# EAGLE board linesensor2 (EAGLE 6.5.0)
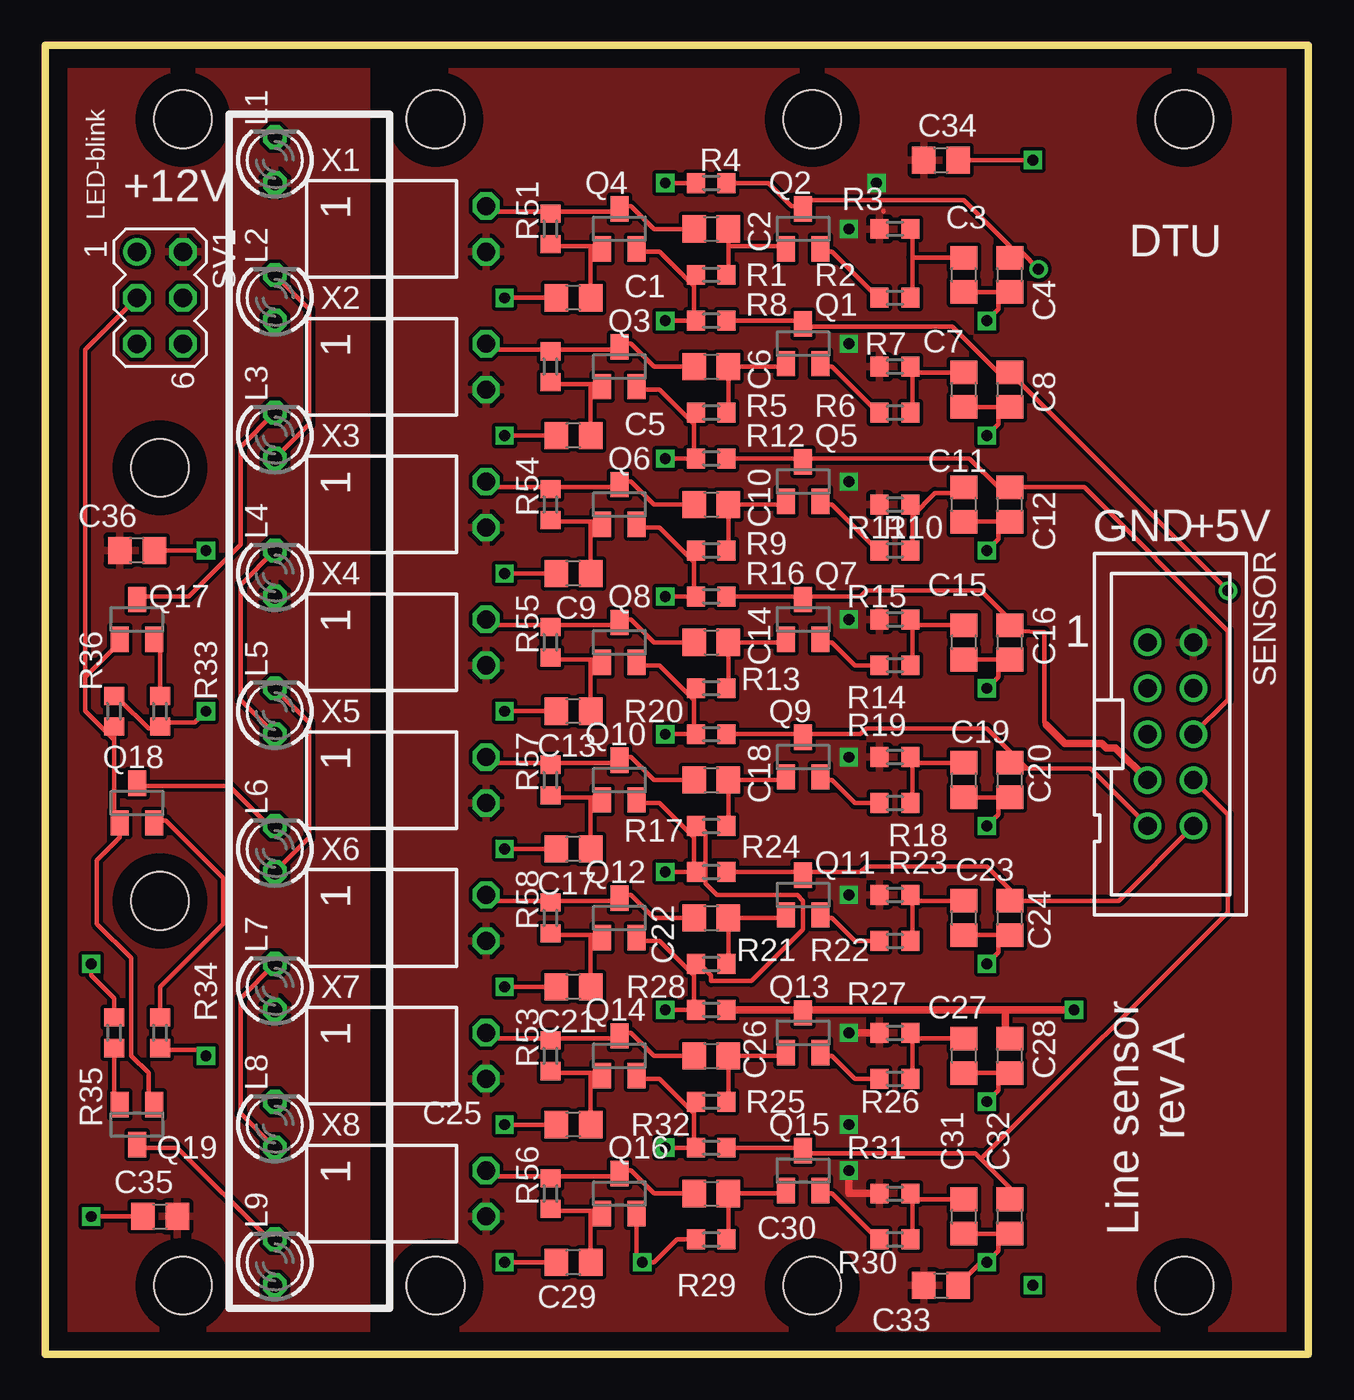
[diagram p0: board, top side]
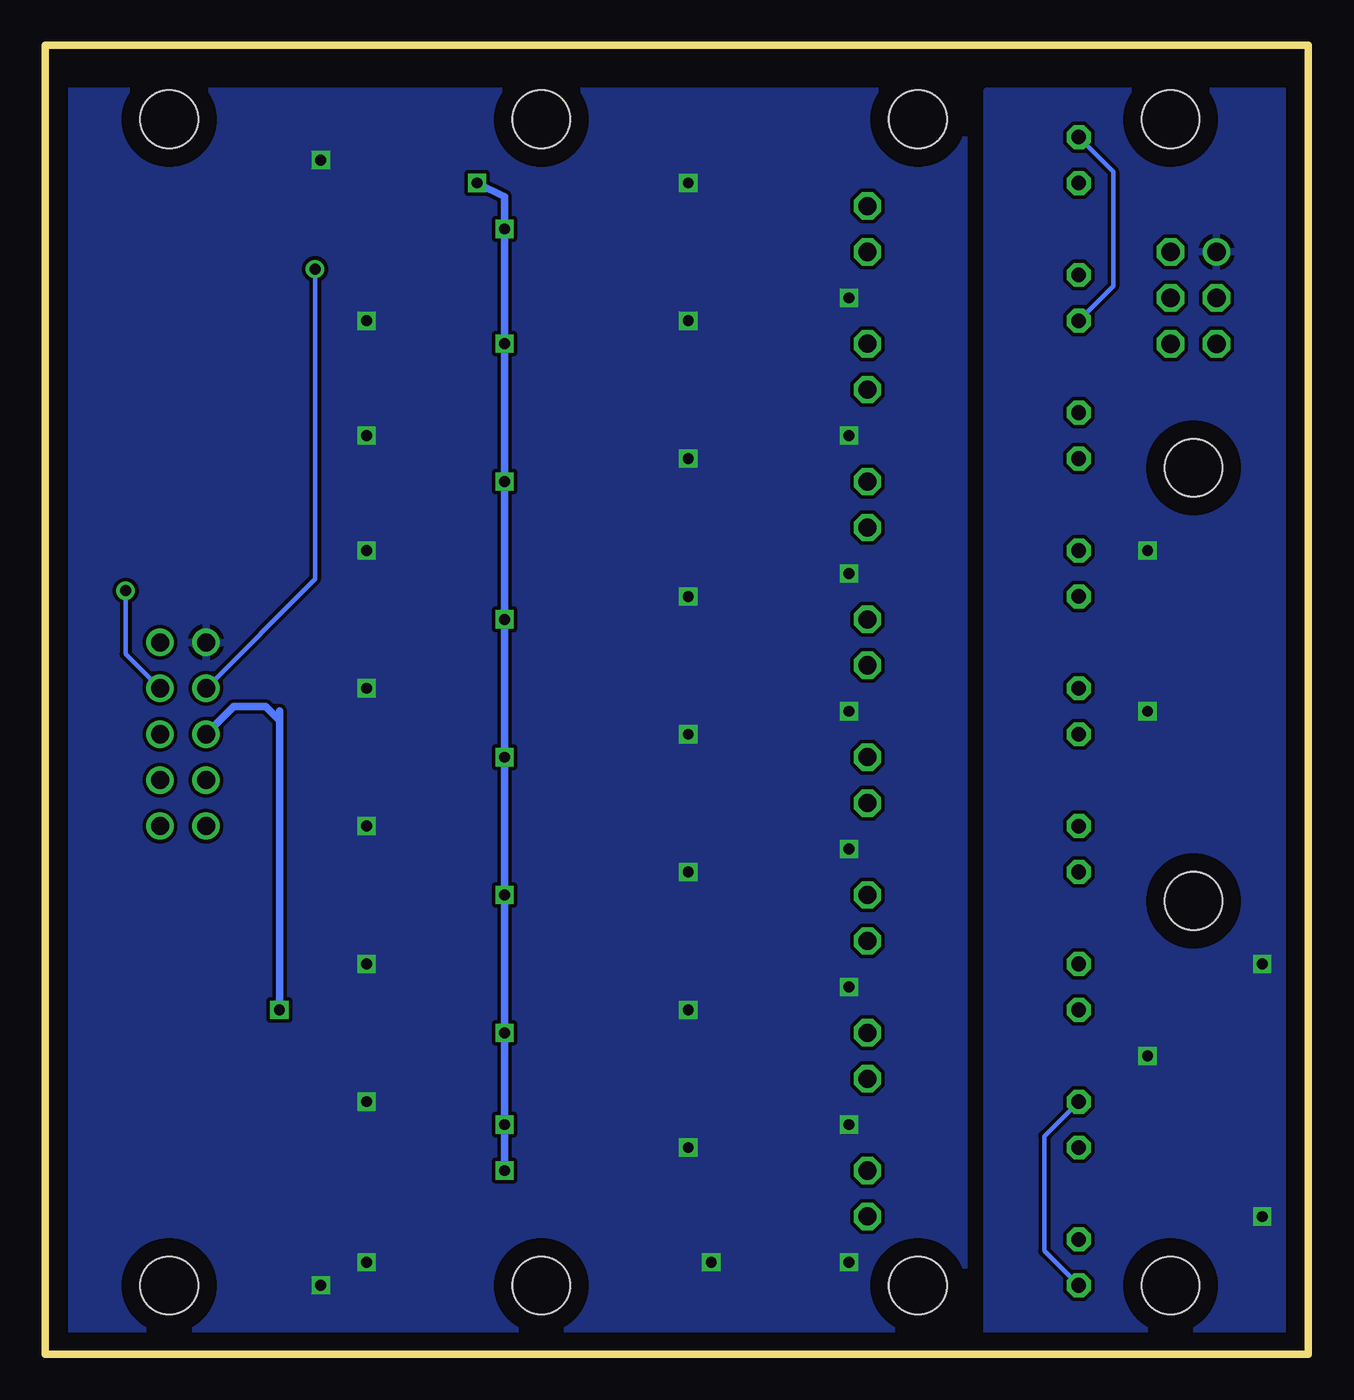
[diagram p1: board, bottom side, seen from below]

Size 69.85 x 72.39 mm. Coordinates in mm from the lower left corner, seen from the top.
Outline: 0,0 0,72.39 69.85,72.39 69.85,0 0,0
Copper layers (1*16): Top 0.035mm / dielectric 1.5mm / Bottom 0.035mm
Design rules "default *": minimum track width 10mil, minimum drill 0.6mm, track to track 8mil, track to pad 8mil, pad to pad 8mil, via to via 8mil, smd to smd 8mil, copper to edge 40mil, drill to drill 8mil, minimum pad ring 10mil, minimum via ring 8mil, stop-mask expansion 4mil, vias tented up to drill 0mil, thermal gap 10mil
Holes 3.2 mm at 7.62,3.81 21.59,68.3 21.59,3.81 6.35,25.07 6.35,49.02 7.62,68.3 42.42,68.3 42.42,3.81 62.99,68.3 62.99,3.81

## Footprints (pad centres in the part's own frame; a part is rotated, then mirrored left to right if it is on the bottom)
C0805 = smd 1.3 x 1.5: 1 -0.95,0; 2 0.95,0
LED3MM = drill 0.813 octagon: A -1.27,0; K 1.27,0
SOT23 = smd 1 x 1.4: 1 -0.95,-1.1; 2 0.95,-1.1; 3 0,1.1
R0603 = smd 1 x 1.1: 1 -0.85,0; 2 0.85,0
PAK100/2500-10 = drill 1 pad 1.422: 1 -5.08,-1.27; 2 -5.08,1.27; 3 -2.54,-1.27; 4 -2.54,1.27; 5 0,-1.27; 6 0,1.27; 7 2.54,-1.27; 8 2.54,1.27; 9 5.08,-1.27; 10 5.08,1.27
MA03-2 = drill 1.016: 1 -2.54,-1.27 | drill 1.016 octagon: 2 -2.54,1.27; 3 0,-1.27; 4 0,1.27; 5 2.54,-1.27; 6 2.54,1.27
SSW-102-02-S-S-RA = drill 1 pad 1.5 octagon: 1 -1.27,1.524; 2 1.27,1.524

## Placement (x,y rotation side)
C1  470nF  [C0805]  29.21,58.42 180 top
C2  100pF  [C0805]  36.83,62.23 0 top
C3  1uF  [C0805]  50.8,59.69 90 top
C4  3.9nF  [C0805]  53.34,59.69 90 top
C5  470nF  [C0805]  29.21,50.8 180 top
C6  100pF  [C0805]  36.83,54.61 0 top
C7  1uF  [C0805]  50.8,53.34 90 top
C8  3.9nF  [C0805]  53.34,53.34 90 top
C9  470nF  [C0805]  29.21,43.18 180 top
C10  100pF  [C0805]  36.83,46.99 0 top
C11  1uF  [C0805]  50.8,46.99 90 top
C12  3.9nF  [C0805]  53.34,46.99 90 top
C13  470nF  [C0805]  29.21,35.56 180 top
C14  100pF  [C0805]  36.83,39.37 0 top
C15  1uF  [C0805]  50.8,39.37 90 top
C16  3.9nF  [C0805]  53.34,39.37 90 top
C17  470nF  [C0805]  29.21,27.94 180 top
C18  100pF  [C0805]  36.83,31.75 0 top
C19  1uF  [C0805]  50.8,31.75 90 top
C20  3.9nF  [C0805]  53.34,31.75 90 top
C21  470nF  [C0805]  29.21,20.32 180 top
C22  100pF  [C0805]  36.83,24.13 0 top
C23  1uF  [C0805]  50.8,24.13 90 top
C24  3.9nF  [C0805]  53.34,24.13 90 top
C25  470nF  [C0805]  29.21,12.7 180 top
C26  100pF  [C0805]  36.83,16.51 0 top
C27  1uF  [C0805]  50.8,16.51 90 top
C28  3.9nF  [C0805]  53.34,16.51 90 top
C29  470nF  [C0805]  29.21,5.08 180 top
C30  100pF  [C0805]  36.83,8.89 0 top
C31  1uF  [C0805]  50.8,7.62 90 top
C32  3.9nF  [C0805]  53.34,7.62 90 top
C33  1uF  [C0805]  49.53,3.81 0 top
C34  1uF  [C0805]  49.53,66.04 0 top
C35  1uF  [C0805]  6.35,7.62 0 top
C36  1uF  [C0805]  5.08,44.45 180 top
L1  red  [LED3MM]  12.7,66.04 90 top
L2  red  [LED3MM]  12.7,58.42 90 top
L3  red  [LED3MM]  12.7,50.8 90 top
L4  red  [LED3MM]  12.7,43.18 90 top
L5  red  [LED3MM]  12.7,35.56 90 top
L6  red  [LED3MM]  12.7,27.94 90 top
L7  red  [LED3MM]  12.7,20.32 90 top
L8  red  [LED3MM]  12.7,12.7 90 top
L9  red  [LED3MM]  12.7,5.08 90 top
Q1  [SOT23]  41.91,55.88 0 top
Q2  [SOT23]  41.91,62.23 0 top
Q3  [SOT23]  31.75,54.61 0 top
Q4  [SOT23]  31.75,62.23 0 top
Q5  [SOT23]  41.91,48.26 0 top
Q6  [SOT23]  31.75,46.99 0 top
Q7  [SOT23]  41.91,40.64 0 top
Q8  [SOT23]  31.75,39.37 0 top
Q9  [SOT23]  41.91,33.02 0 top
Q10  [SOT23]  31.75,31.75 0 top
Q11  [SOT23]  41.91,25.4 0 top
Q12  [SOT23]  31.75,24.13 0 top
Q13  [SOT23]  41.91,17.78 0 top
Q14  [SOT23]  31.75,16.51 0 top
Q15  [SOT23]  41.91,10.16 0 top
Q16  [SOT23]  31.75,8.89 0 top
Q17  mmbf170  [SOT23]  5.08,40.64 0 top
Q18  mmbf170  [SOT23]  5.08,30.48 0 top
Q19  mmbf170  [SOT23]  5.08,12.7 180 top
R1  1M  [R0603]  36.83,59.69 0 top
R2  820  [R0603]  46.99,58.42 0 top
R3  56k  [R0603]  46.99,62.23 180 top
R4  12k  [R0603]  36.83,64.77 0 top
R5  1M  [R0603]  36.83,52.07 0 top
R6  820  [R0603]  46.99,52.07 0 top
R7  56k  [R0603]  46.99,54.61 180 top
R8  12k  [R0603]  36.83,57.15 0 top
R9  1M  [R0603]  36.83,44.45 0 top
R10  820  [R0603]  46.99,44.45 0 top
R11  56k  [R0603]  46.99,46.99 180 top
R12  12k  [R0603]  36.83,49.53 0 top
R13  1M  [R0603]  36.83,36.83 0 top
R14  820  [R0603]  46.99,38.1 0 top
R15  56k  [R0603]  46.99,40.64 180 top
R16  12k  [R0603]  36.83,41.91 0 top
R17  1M  [R0603]  36.83,29.21 0 top
R18  820  [R0603]  46.99,30.48 0 top
R19  56k  [R0603]  46.99,33.02 180 top
R20  12k  [R0603]  36.83,34.29 0 top
R21  1M  [R0603]  36.83,21.59 0 top
R22  820  [R0603]  46.99,22.86 0 top
R23  56k  [R0603]  46.99,25.4 180 top
R24  12k  [R0603]  36.83,26.67 0 top
R25  1M  [R0603]  36.83,13.97 0 top
R26  820  [R0603]  46.99,15.24 0 top
R27  56k  [R0603]  46.99,17.78 180 top
R28  12k  [R0603]  36.83,19.05 0 top
R29  1M  [R0603]  36.83,6.35 0 top
R30  820  [R0603]  46.99,6.35 0 top
R31  56k  [R0603]  46.99,8.89 180 top
R32  12k  [R0603]  36.83,11.43 0 top
R33  12  [R0603]  6.35,35.56 90 top
R34  12  [R0603]  6.35,17.78 90 top
R35  12  [R0603]  3.81,17.78 270 top
R36  10k  [R0603]  3.81,35.56 270 top
R51  820k  [R0603]  27.94,62.23 90 top
R52  820k  [R0603]  27.94,54.61 90 top
R53  820k  [R0603]  27.94,16.51 90 top
R54  820k  [R0603]  27.94,46.99 90 top
R55  820k  [R0603]  27.94,39.37 90 top
R56  820k  [R0603]  27.94,8.89 90 top
R57  820k  [R0603]  27.94,31.75 90 top
R58  820k  [R0603]  27.94,24.13 90 top
SENSOR  2510-  [PAK100/2500-10]  62.23,34.29 270 top
SV1  LEDctrl  [MA03-2]  6.35,58.42 270 top
X1  [SSW-102-02-S-S-RA]  22.86,62.23 270 top
X2  [SSW-102-02-S-S-RA]  22.86,54.61 270 top
X3  [SSW-102-02-S-S-RA]  22.86,46.99 270 top
X4  [SSW-102-02-S-S-RA]  22.86,39.37 270 top
X5  [SSW-102-02-S-S-RA]  22.86,31.75 270 top
X6  [SSW-102-02-S-S-RA]  22.86,24.13 270 top
X7  [SSW-102-02-S-S-RA]  22.86,16.51 270 top
X8  [SSW-102-02-S-S-RA]  22.86,8.89 270 top

## Library data of the parts
C1-C36 = eagle-ltspice; SPICEMODEL: NONE; SPICEPREFIX: C
L1-L9 = led
Q1-Q19 = transistor-small-signal
R1-R36 R51-R58 = eagle-ltspice; SPICEMODEL: NONE; SPICEPREFIX: R
SENSOR = con-3m; MF: 3M; MPN: 2510-6002UB; OC_FARNELL: 9838244; OC_NEWARK: 46F4725
SV1 = con-lstb; OC_FARNELL: unknown; OC_NEWARK: unknown
X1-X8 = con-samtec; MPN: BPW46; OC_FARNELL: unknown; OC_NEWARK: 11P9352

## Nets
GATE_CTRL: Q17.1 Q18.1 Q19.1 R36.2 SV1.3
GND: C1.2 C3.1 C4.1 C5.2 C7.1 C8.1 C9.2 C11.1 C12.1 C13.2 C15.1 C16.1 C17.2 C19.1 C20.1 C21.2 C23.1 C24.1 C25.2 C27.1 C28.1 C29.2 C31.1 C32.1 C33.2 C34.2 Q3.2 Q4.2 Q6.2 Q8.2 Q10.2 Q12.2 Q14.2 Q16.2 R1.1 R4.1 R5.1 R8.1 R9.1 R12.1 R13.1 R16.1 R17.1 R20.1 R21.1 R24.1 R25.1 R28.1 R29.1 R32.1 SENSOR.1
GND2: C35.1 C36.1 R33.1 R34.1 R35.1 R36.1 SV1.1
LS0: C4.2 Q2.3 R4.2 SENSOR.3
LS1: C8.2 Q1.3 R8.2 SENSOR.4
LS2: C28.2 Q13.3 R28.2 SENSOR.5
LS3: C12.2 Q5.3 R12.2 SENSOR.6
LS5: C32.2 Q15.3 R32.2 SENSOR.8
LS6: C20.2 Q9.3 R20.2 SENSOR.9
LS7: C24.2 Q11.3 R24.2 SENSOR.10
N$1: Q2.2 R2.1
N$2: Q1.2 R6.1
N$3: C1.1 Q4.1 R51.1
N$4: C2.1 Q4.3 R51.2 X1.1
N$5: C2.2 Q2.1 R1.2
N$6: L1.K L2.A
N$7: C3.2 R2.2 R3.1
N$8: C5.1 Q3.1 R52.1
N$9: C6.1 Q3.3 R52.2 X2.1
N$10: C6.2 Q1.1 R5.2
N$11: L2.K L3.A
N$12: C7.2 R6.2 R7.1
N$14: Q5.2 R10.1
N$15: C9.1 Q6.1 R54.1
N$16: C10.1 Q6.3 R54.2 X3.1
N$17: C10.2 Q5.1 R9.2
N$18: L4.K L5.A
N$19: C11.2 R10.2 R11.1
N$20: Q7.2 R14.1
N$21: C13.1 Q8.1 R55.1
N$22: C14.1 Q8.3 R55.2 X4.1
N$23: C14.2 Q7.1 R13.2
N$24: L5.K L6.A
N$25: C15.2 R14.2 R15.1
N$26: Q9.2 R18.1
N$27: C17.1 Q10.1 R57.1
N$28: C18.1 Q10.3 R57.2 X5.1
N$29: C18.2 Q9.1 R17.2
N$30: L7.K L8.A
N$31: C19.2 R18.2 R19.1
N$32: Q11.2 R22.1
N$33: C21.1 Q12.1 R58.1
N$34: C22.1 Q12.3 R58.2 X6.1
N$35: C22.2 Q11.1 R21.2
N$36: L8.K L9.A
N$37: C23.2 R22.2 R23.1
N$38: Q13.2 R26.1
N$39: C25.1 Q14.1 R53.1
N$40: C26.1 Q14.3 R53.2 X7.1
N$41: C26.2 Q13.1 R25.2
N$42: L3.K Q17.3
N$43: C27.2 R26.2 R27.1
N$44: Q15.2 R30.1
N$45: C29.1 Q16.1 R56.1
N$46: C30.1 Q16.3 R56.2 X8.1
N$47: C30.2 Q15.1 R29.2
N$48: L6.K Q18.3
N$49: C31.2 R30.2 R31.1
N$50: L9.K Q19.3
N$51: Q17.2 R33.2
N$52: Q18.2 R34.2
N$53: Q19.2 R35.2
N$56: C16.2 Q7.3 R16.2 SENSOR.7
VDD: C33.1 C34.1 R3.2 R7.2 R11.2 R15.2 R19.2 R23.2 R27.2 R31.2 SENSOR.2 X1.2 X2.2 X3.2 X4.2 X5.2 X6.2 X7.2 X8.2
VDD2: C35.2 C36.2 L1.A L4.A L7.A SV1.2

## Tracks (layer width: path | path; a pad name or v marks a point on that pad's centre or on a via)
GATE_CTRL
  Top 0.254: 3.81,33.97 3.81,29.84 4.13,29.53 Q18.1 4.13,29.21 4.13,28.57 2.86,27.3 2.86,23.81 4.76,21.91 4.76,16.51 5.71,15.56 5.71,13.97 Q19.1 | 3.81,33.97 R36.2 | 2.22,37.47 4.13,39.37 Q17.1 | 2.22,37.47 2.22,35.56 3.81,33.97 | 2.22,37.47 2.22,55.56 SV1.3
GND  (via drill 0.6)
  Top 0.254: 52.7,58.74 C4.1 52.7,58.74 | 52.7,58.74 C3.1 | 52.7,52.39 C8.1 52.7,52.39 | 52.7,52.39 C7.1 | 52.7,46.04 C12.1 52.7,46.04 | 52.7,46.04 C11.1 | 52.7,38.42 C16.1 52.7,38.42 | 52.7,38.42 C15.1 | 52.7,30.8 C20.1 | 52.7,30.8 C19.1 | 52.7,23.18 C24.1 52.7,23.18 | 52.7,23.18 C23.1 | 52.7,15.56 C28.1 52.7,15.56 | 52.7,15.56 C27.1 | 52.7,6.67 C32.1 52.7,6.67 | 52.7,6.67 C31.1 | R29.1 34.92,6.35 33.66,5.08 v33.02,5.08 32.7,5.4 32.7,7.62 Q16.2 | v34.29,11.43 35.88,11.43 | 35.88,11.43 35.88,13.34 | 35.88,13.34 35.88,13.97 R25.1 | 35.88,11.43 R32.1 | v34.29,19.05 35.88,19.05 | 35.88,19.05 35.88,20.95 | 35.88,20.95 35.88,21.59 R21.1 36.2,21.59 36.83,20.95 36.83,20.64 39.05,20.64 41.91,23.5 41.91,25.08 41.59,25.4 37.15,25.4 36.51,26.04 36.51,28.89 36.2,29.21 R17.1 | 35.88,19.05 R28.1 | v34.29,26.67 35.88,26.67 | 35.88,26.67 35.88,28.57 | 35.88,28.57 35.88,29.21 | 35.88,26.67 R24.1 | v34.29,34.29 35.88,34.29 | 35.88,34.29 35.88,36.2 | 35.88,36.2 35.88,36.83 R13.1 | v34.29,41.91 35.88,41.91 | 35.88,41.91 35.88,43.81 | 35.88,43.81 35.88,44.45 R9.1 | 35.88,41.91 R16.1 | v34.29,49.53 35.88,49.53 | 35.88,49.53 35.88,51.44 | 35.88,51.44 35.88,52.07 R5.1 | 35.88,49.53 R12.1 | v34.29,57.15 35.88,57.15 | 35.88,57.15 35.88,59.05 | 35.88,59.05 35.88,59.69 R1.1 | 35.88,57.15 R8.1 | v34.29,64.77 R4.1 | 35.88,13.34 33.97,15.24 32.7,15.24 Q14.2 | 35.88,20.95 33.97,22.86 32.7,22.86 Q12.2 | 35.88,28.57 33.97,30.48 32.7,30.48 Q10.2 | 35.88,36.2 33.97,38.1 32.7,38.1 Q8.2 | 35.88,43.81 33.97,45.72 32.7,45.72 Q6.2 | 35.88,51.44 33.97,53.34 32.7,53.34 Q3.2 | 35.88,59.05 33.97,60.96 32.7,60.96 Q4.2 | v25.4,5.08 C29.2 | v25.4,12.7 C25.2 | v25.4,20.32 C21.2 | v25.4,27.94 C17.2 | v25.4,35.56 C13.2
  Top 0.254: v25.4,43.18 C9.2 | v25.4,50.8 C5.2 | v25.4,58.42 C1.2 | C33.2 51.75,5.08 v52.07,5.08 52.7,5.71 52.7,6.67 | v54.61,66.04 C34.2 | 52.7,15.56 52.7,14.61 v52.07,13.97 | 52.7,23.18 52.7,22.23 v52.07,21.59 | 52.7,30.8 52.7,29.84 v52.07,29.21 | 52.7,38.42 52.7,37.47 v52.07,36.83 | 52.7,46.04 52.7,45.09 v52.07,44.45 | 52.7,52.39 52.7,51.44 v52.07,50.8 | 52.7,58.74 52.7,57.78 v52.07,57.15 | 35.88,34.29 R20.1
  other vias: 54.61,3.81
  pour Bottom: 19.05,69.85 68.58,69.85 68.58,1.27 19.05,1.27
GND2  (via drill 0.6)
  Top 0.254: v8.89,16.51 8.57,16.83 6.35,16.83 R34.1 | R35.1 3.81,19.68 2.54,20.95 v2.54,21.59 | v8.89,35.56 8.26,34.92 6.35,34.92 R33.1 6.35,34.61 5.71,34.61 4.13,36.2 3.81,36.2 R36.1 | v2.54,7.62 C35.1 | v8.89,44.45 C36.1
  pour Bottom: 1.27,69.85 17.78,69.85 17.78,1.27 1.27,1.27
LS0  (via drill 0.61)
  Top 0.254: R4.2 40.01,64.77 41.27,63.5 41.91,63.5 | 53.34,60.96 53.34,61.28 50.8,63.82 42.23,63.82 41.91,63.5 | 41.91,63.5 Q2.3 | v54.93,60.01 53.98,60.96 53.34,60.96 | 53.34,60.96 C4.2
  Bottom 0.254: v54.93,60.01 54.93,42.86 SENSOR.3
LS1  (via drill 0.61)
  Top 0.254: R8.2 41.91,57.15 Q1.3 41.91,56.83 50.16,56.83 52.7,54.29 C8.2 | C8.2 v65.41,42.23 | C8.2
  Bottom 0.254: v65.41,42.23 65.41,38.73 SENSOR.4
LS2  (via drill 0.6)
  Top 0.254: R28.2 37.78,19.05 37.85,19.05 | C28.2 53.24,17.37
  Top 0.406: 37.85,19.05 41.91,19.05 | 41.91,19.05 53.09,19.05 | 53.09,19.05 v56.9,19.05 | 53.09,19.05 53.09,17.53 53.24,17.37 53.34,17.27 | 41.91,18.8 Q13.3 41.91,19.05
  Bottom 0.406: v56.9,19.05 56.9,35.05 | 56.9,35.05 56.9,35.56 | SENSOR.5 59.44,35.81 57.66,35.81 56.9,35.05
LS3
  Top 0.254: 41.91,49.53 R12.2 | C12.2 52.7,47.94 51.12,49.53 41.91,49.53 | 41.91,49.53 Q5.3 | C12.2 57.47,47.94 65.41,40.01 65.41,36.2 SENSOR.6 | C12.2
LS5
  Top 0.254: R32.2 41.91,11.43 Q15.3 41.91,11.11 51.44,11.11 51.75,10.79 | 51.75,10.79 53.34,9.21 C32.2 | SENSOR.8 65.41,29.84 65.41,24.45 51.75,10.79
LS6
  Top 0.254: 54.29,32.38 57.78,32.38 SENSOR.9 | 54.29,32.38 53.34,32.38 C20.2 | 41.91,34.29 45.09,34.29 45.4,34.61 52.07,34.61 54.29,32.38 | 41.91,34.29 R20.2 | 41.91,34.29 Q9.3
LS7
  Top 0.254: 41.91,26.67 R24.2 | 53.98,25.08 59.37,25.08 SENSOR.10 | 53.98,25.08 C24.2 | 41.91,26.67 45.09,26.67 45.4,26.99 52.07,26.99 53.98,25.08 | 41.91,26.67 Q11.3
N$1
  Top 0.254: R2.1 46.04,58.42 43.5,60.96 42.86,60.96 Q2.2
N$2
  Top 0.254: R6.1 46.04,52.07 43.5,54.61 42.86,54.61 Q1.2
N$3
  Top 0.254: 30.16,61.28 30.8,61.28 Q4.1 | 30.16,61.28 27.94,61.28 R51.1 | 30.16,61.28 C1.1
N$4
  Top 0.254: C2.1 33.66,62.23 32.38,63.5 31.75,63.5 Q4.3 31.75,63.18 27.94,63.18 | 27.94,63.18 24.77,63.18 24.45,63.5 X1.1 | 27.94,63.18 R51.2
N$5
  Top 0.254: 37.78,61.28 C2.2 | 37.78,61.28 37.78,59.69 R1.2 | 37.78,61.28 40.96,61.28 Q2.1
N$6
  Bottom 0.254: L2.A 10.79,59.05 10.79,65.41 L1.K
N$7
  Top 0.254: 47.94,60.64 47.94,62.23 R3.1 | 47.94,60.64 47.94,58.42 R2.2 | 47.94,60.64 C3.2
N$8
  Top 0.254: 30.16,53.66 30.8,53.66 Q3.1 | 30.16,53.66 27.94,53.66 R52.1 | 30.16,53.66 C5.1
N$9
  Top 0.254: C6.1 33.66,54.61 32.38,55.88 31.75,55.88 Q3.3 31.75,55.56 27.94,55.56 | 27.94,55.56 24.77,55.56 24.45,55.88 X2.1 | 27.94,55.56 R52.2
N$10
  Top 0.254: C6.2 37.78,52.07 R5.2 | C6.2 40.96,54.61 Q1.1 | C6.2
N$11
  Top 0.254: L3.A 14.61,51.44 14.61,57.78 L2.K
N$12
  Top 0.254: 47.94,54.29 47.94,54.61 R7.1 47.94,54.29 | 47.94,54.29 47.94,52.07 R6.2 | 47.94,54.29 C7.2
N$14
  Top 0.254: R10.1 46.04,44.45 43.5,46.99 42.86,46.99 Q5.2
N$15
  Top 0.254: 30.16,46.04 30.8,46.04 Q6.1 | 30.16,46.04 27.94,46.04 R54.1 | 30.16,46.04 C9.1
N$16
  Top 0.254: C10.1 33.66,46.99 32.38,48.26 31.75,48.26 Q6.3 31.75,47.94 27.94,47.94 | 27.94,47.94 24.77,47.94 24.45,48.26 X3.1 | 27.94,47.94 R54.2
N$17
  Top 0.254: C10.2 37.78,44.45 R9.2 | C10.2 40.96,46.99 Q5.1 | C10.2
N$18
  Top 0.254: L5.A 10.79,36.2 10.79,42.55 L4.K
N$19
  Top 0.254: 47.94,46.35 47.94,46.99 R11.1 | 47.94,46.35 47.94,44.45 R10.2 | 47.94,46.35 49.21,47.62 50.8,47.62 C11.2
N$20
  Top 0.254: R14.1 44.77,38.1 43.5,39.37 42.86,39.37 Q7.2
N$21
  Top 0.254: 30.16,38.42 30.8,38.42 Q8.1 | 30.16,38.42 27.94,38.42 R55.1 | 30.16,38.42 C13.1
N$22
  Top 0.254: C14.1 33.66,39.37 32.38,40.64 31.75,40.64 Q8.3 31.75,40.32 27.94,40.32 | 27.94,40.32 24.77,40.32 24.45,40.64 X4.1 | 27.94,40.32 R55.2
N$23
  Top 0.254: C14.2 37.78,36.83 R13.2 | C14.2 40.96,39.37 Q7.1 | C14.2
N$24
  Top 0.254: L6.A 14.61,28.57 14.61,34.92 L5.K
N$25
  Top 0.254: 47.94,40.32 47.94,40.64 R15.1 47.94,40.32 | 47.94,40.32 47.94,38.1 R14.2 | 47.94,40.32 C15.2
N$26
  Top 0.254: R18.1 44.77,30.48 43.5,31.75 42.86,31.75 Q9.2
N$27
  Top 0.254: 30.16,30.8 30.8,30.8 Q10.1 | 30.16,30.8 27.94,30.8 R57.1 | 30.16,30.8 C17.1
N$28
  Top 0.254: C18.1 33.66,31.75 32.38,33.02 31.75,33.02 Q10.3 31.75,32.7 27.94,32.7 | 27.94,32.7 24.77,32.7 24.45,33.02 X5.1 | 27.94,32.7 R57.2
N$29
  Top 0.254: C18.2 37.78,29.21 R17.2 | C18.2 40.96,31.75 Q9.1 | C18.2
N$30
  Top 0.254: L8.A 10.79,13.34 10.79,19.68 L7.K
N$31
  Top 0.254: 47.94,32.7 47.94,33.02 R19.1 47.94,32.7 | 47.94,32.7 47.94,30.48 R18.2 | 47.94,32.7 C19.2
N$32
  Top 0.254: R22.1 44.77,22.86 43.5,24.13 42.86,24.13 Q11.2
N$33
  Top 0.254: 30.16,23.18 30.8,23.18 Q12.1 | 30.16,23.18 27.94,23.18 R58.1 | 30.16,23.18 C21.1
N$34
  Top 0.254: C22.1 33.66,24.13 32.38,25.4 31.75,25.4 Q12.3 31.75,25.08 27.94,25.08 | 27.94,25.08 24.77,25.08 24.45,25.4 X6.1 | 27.94,25.08 R58.2
N$35
  Top 0.254: C22.2 37.78,21.59 R21.2 | C22.2 40.96,24.13 Q11.1 | C22.2
N$36
  Bottom 0.254: L9.A 14.61,5.71 14.61,12.06 L8.K
N$37
  Top 0.254: 47.94,25.08 47.94,25.4 R23.1 47.94,25.08 | 47.94,25.08 47.94,22.86 R22.2 | 47.94,25.08 C23.2
N$38
  Top 0.254: R26.1 44.77,15.24 43.5,16.51 42.86,16.51 Q13.2
N$39
  Top 0.254: 30.16,15.56 30.8,15.56 Q14.1 | 30.16,15.56 27.94,15.56 R53.1 | 30.16,15.56 C25.1
N$40
  Top 0.254: C26.1 33.66,16.51 32.38,17.78 31.75,17.78 Q14.3 31.75,17.46 27.94,17.46 | 27.94,17.46 24.77,17.46 24.45,17.78 X7.1 | 27.94,17.46 R53.2
N$41
  Top 0.254: C26.2 37.78,13.97 R25.2 | C26.2 40.96,16.51 Q13.1 | C26.2
N$42
  Top 0.254: L3.K 10.79,50.16 10.79,44.77 7.94,41.91 5.08,41.91 Q17.3
N$43
  Top 0.254: 47.94,17.46 47.94,17.78 R27.1 47.94,17.46 | 47.94,17.46 47.94,15.24 R26.2 | 47.94,17.46 C27.2
N$44
  Top 0.254: R30.1 46.04,6.35 43.5,8.89 42.86,8.89 Q15.2
N$45
  Top 0.254: 30.16,7.94 30.8,7.94 Q16.1 | 30.16,7.94 27.94,7.94 R56.1 | 30.16,7.94 C29.1
N$46
  Top 0.254: C30.1 33.66,8.89 32.38,10.16 31.75,10.16 Q16.3 31.75,9.84 27.94,9.84 | 27.94,9.84 24.77,9.84 24.45,10.16 X8.1 | 27.94,9.84 R56.2
N$47
  Top 0.254: C30.2 37.78,6.35 R29.2 | C30.2 40.96,8.89 Q15.1 | C30.2
N$48
  Top 0.254: L6.K 12.38,29.21 10.16,31.43 5.08,31.43 Q18.3
N$49
  Top 0.254: 47.94,8.57 47.94,8.89 R31.1 47.94,8.57 | 47.94,8.57 47.94,6.35 R30.2 | 47.94,8.57 C31.2
N$50
  Top 0.254: L9.K 12.38,6.35 7.3,11.43 5.08,11.43 Q19.3
N$51
  Top 0.254: R33.2 6.35,39.05 6.03,39.37 Q17.2
N$52
  Top 0.254: R34.2 6.35,20.32 9.84,23.81 9.84,26.35 6.67,29.53 6.03,29.53 Q18.2
N$53
  Top 0.254: R35.2 3.81,14.29 4.13,13.97 Q19.2
N$56
  Top 0.254: 41.91,41.91 R16.2 | 41.91,41.91 45.09,41.91 45.4,42.23 51.75,42.23 53.34,40.64 C16.2 53.34,40.01 53.66,40.01 55.24,39.94 55.24,34.92 55.37,34.8 | 41.91,41.91 Q7.3
  Top 0.406: 55.37,34.8 56.39,33.78 58.42,33.78 58.67,33.53 59.18,33.53 SENSOR.7
VDD  (via drill 0.6)
  Top 0.254: 46.35,63.18 46.35,63.24
  Top 0.406: R31.2 44.45,8.89 v44.45,10.16 | R27.2 v44.45,17.78
  Bottom 0.406: v44.45,10.16 v44.45,12.7 v44.45,17.78 v44.45,25.4 v44.45,33.02 v44.45,40.64 v44.45,48.26 v44.45,55.88 v44.45,62.23 44.45,64.01 v45.97,64.77
  pour Top: 19.05,71.12 19.05,1.27 68.58,1.27 68.58,71.12
VDD2
  pour Top: 1.27,71.12 17.78,71.12 17.78,1.27 1.27,1.27

## Text on the board
tPlace: +12V | LED-blink | DTU | GND | +5V | 1 | rev A | Line sensor